# Altium PCB PCB V1.PcbDoc
Units mm, origin at the board's own origin, x right, y up, seen from the top; angles counter-clockwise.
Board outline 90 x 50 mm, 2 copper layers (Top Layer, Bottom Layer); 26 components, 22 nets, 122 pads, 31 vias.
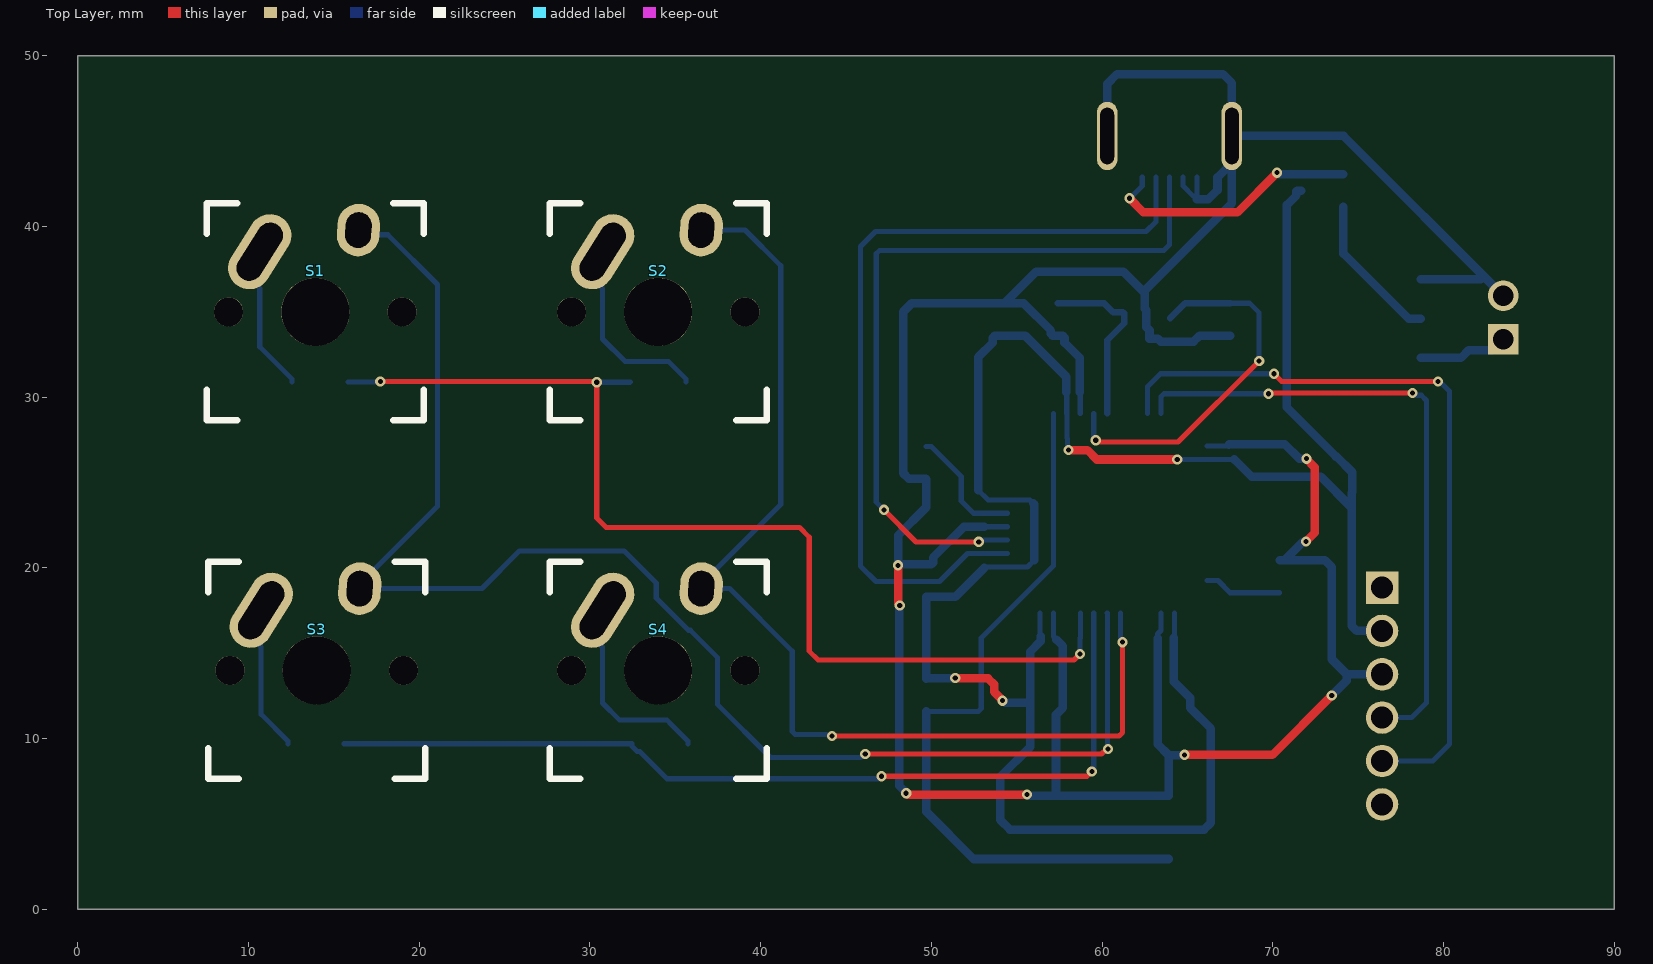
[diagram p0: Top Layer view]
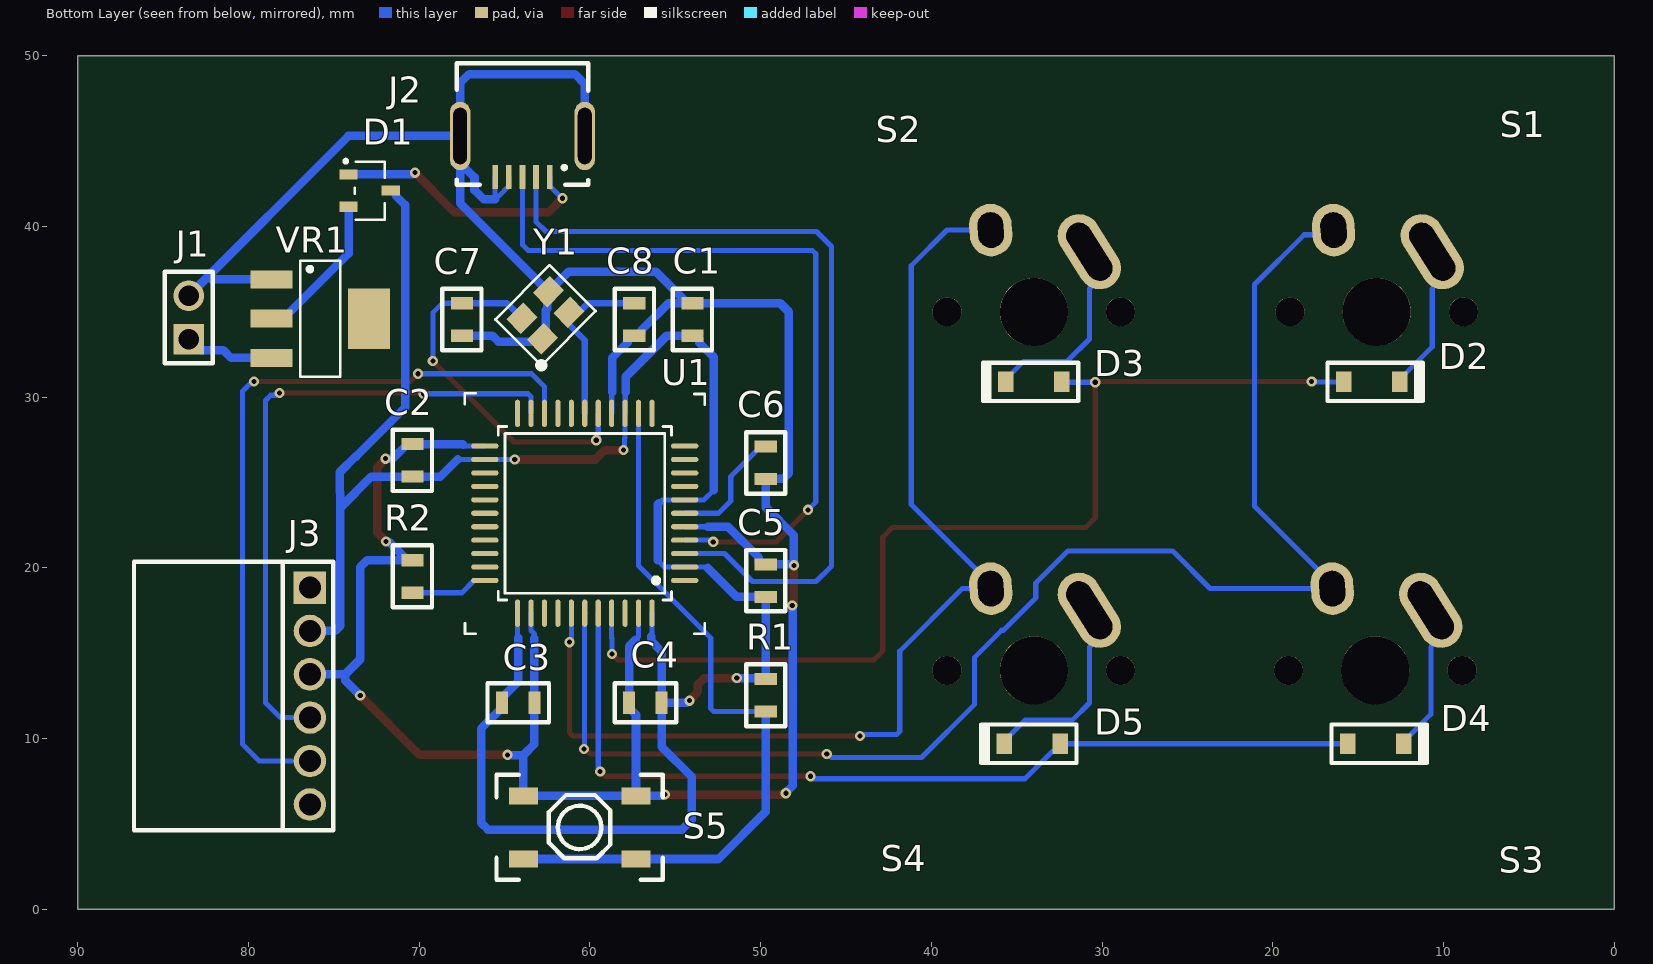
[diagram p1: Bottom Layer view, seen from below]
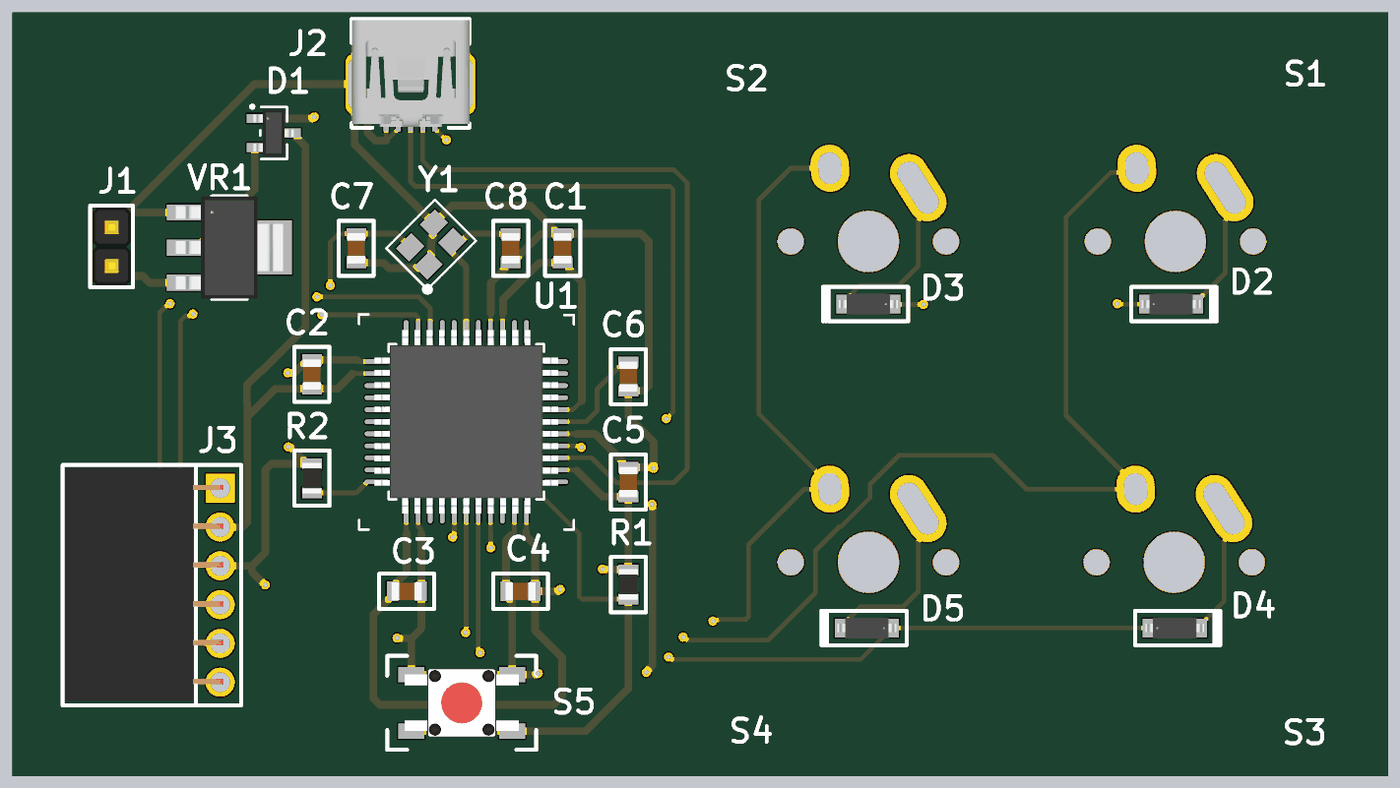
[diagram p2: 3D render of the assembled board from below, using the file's embedded part models]

## Layer stack, top to bottom
Top Solder: solder mask 0.0102, Solder Resist, Dk 3.5
Top Layer: signal copper 0.0356
Dielectric 1: dielectric 0.32, FR-4, Dk 4.8
Bottom Layer: signal copper 0.0356
Bottom Solder: solder mask 0.0102, Solder Resist, Dk 3.5

## Board outline
0,0 90,0 90,50 0,50

## Design rules (kind name [scope] priority, off if disabled: settings)
Clearance [All] p1: gap=0.2 ignorepadtopadclearanceinfootprint=FALSE
HoleSize [All] p1: absolutevalues=TRUE maxlimit=10 minlimit=0.025 maxpercent=80.000 minpercent=20.000
PolygonConnect [All] p1: connectstyle=Relief reliefconductorwidth=0.254 reliefentries=4 polygonreliefangle="90 Angle" airgapwidth=0.254
RoutingVias [All] p1: holewidth=0.3 width=0.6 viastyle="Through Hole" minholewidth=0.3 minwidth=0.6 maxholewidth=0.3 maxwidth=0.6
SolderMaskExpansion [All] p1: expansion=0.102 istentingtop=FALSE
Width [All] p1: maxlimit=0.5 minlimit=0.3 preferedwidth=0.3
29 further rules are at their usual default settings.

## Components (designator, comment, footprint, x,y, rotation, side; value= is the part's Value field where it differs from the comment)
C1 "C 0.1UF" C0805 54,34.552 r270 bottom
C2 "C 0.1UF" C0805 70.4,26.3 r270 bottom
C3 "C 0.1UF" C0805 64.2,12.1 r0 bottom
C4 "C 0.1UF" C0805 56.752,12.1 r180 bottom
C5 "C 4.7UF" C0805 49.7,19.252 r270 bottom
C6 "C 1UF" C0805 49.7,26.153 r270 bottom
C7 "C 22PF" C0805 67.5,34.552 r90 bottom
C8 "C 22PF" C0805 57.4,34.552 r90 bottom
D1 "Schottky" SOT-23-3_L2.9-W1.6-P1.90-LS2.8-BR 72.9,42.1 r0 bottom
D2 "Diode" Diode 14.2,30.9 r0 bottom
D3 "Diode" Diode 34,30.9 r180 bottom
D4 "Diode" Diode 13.962,9.7 r0 bottom
D5 "Diode" Diode 34.1,9.7 r180 bottom
J1 "BAT" HDR-TH_2P-P2.54-V-M-1 83.5,34.67 r90 bottom
J2 "USB" USB-MINI-SMD_UX60SC-MB-5S8-80 63.95,44.1 r0 bottom
J3 "HDR-Bluetooth" HDR-TH_6P-P2.54-H-W8.6_A2541HWR-6P 76.4,12.5 r270 bottom
R1 "R 10kohm" R0805 49.7,12.548 r270 bottom
R2 "R 10kohm" R0805 70.4,19.5 r90 bottom
S1 "Switch" Mx_Alps_100 13.92,35 r0 top
S2 "Switch" Mx_Alps_100 34,35 r0 top
S3 "Switch" Mx_Alps_100 14,14 r0 top
S4 "Switch" Mx_Alps_100 34,14 r0 top
S5 "Button" SW-SMD_4P-L5.1-W5.1-P3.70-LS6.5-TL-2 60.6,4.8 r0 bottom
U1 "MCU" ATMEGA32U4 60.3,23.2 r90 bottom
VR1 "Regulator" SOT-223_L6.5-W3.5-P2.30-LS7.0-BR 75.8,34.6 r0 bottom
Y1 "Crystal" CRYSTAL-SMD_4P-L3.2-W2.5-BL 62.6,34.8 r135 bottom

## Footprints (in the part's own frame and the unit in brackets; to place one, negate y for a bottom-side part, rotate by r counter-clockwise, add the part's x,y. Pads: shape width x height; smd on the part's side, far side on the other; paste and mask are expansions set on the pad)
ATMEGA32U4 [mm]
  oval 0.3x1.6 smd: 1(-3.937,-5.851) 2(-3.15,-5.851) 3(-2.362,-5.851) 4(-1.575,-5.851) 5(-0.787,-5.851) 6(0,-5.851) 7(0.787,-5.851) 8(1.575,-5.851) 9(2.362,-5.851) 10(3.15,-5.851) 11(3.937,-5.851) 23(3.937,5.851) 24(3.15,5.851) 25(2.362,5.851) 26(1.575,5.851) 27(0.787,5.851) 28(0,5.851) 29(-0.787,5.851) 30(-1.575,5.851) 31(-2.362,5.851) 32(-3.15,5.851) 33(-3.937,5.851)
  oval 1.6x0.3 smd: 12(5.851,-3.937) 13(5.851,-3.15) 14(5.851,-2.362) 15(5.851,-1.575) 16(5.851,-0.787) 17(5.851,0) 18(5.851,0.787) 19(5.851,1.575) 20(5.851,2.362) 21(5.851,3.15) 22(5.851,3.937) 34(-5.851,3.937) 35(-5.851,3.15) 36(-5.851,2.362) 37(-5.851,1.575) 38(-5.851,0.787) 39(-5.851,0) 40(-5.851,-0.787) 41(-5.851,-1.575) 42(-5.851,-2.362) 43(-5.851,-3.15) 44(-5.851,-3.937)
  silkscreen extent -7.06,-7.04 7.03,7.02, body extent -6,-6 6,6
C0805 [mil]
  rect 28x51 smd: 1(-37.5,0) 2(37.5,0)
  silkscreen extent -71,-45 71,45, body extent -39,-24 39,24, height 47
CRYSTAL-SMD_4P-L3.2-W2.5-BL [mm]
  rect 1.4x1.2 smd: 1(-1.1,-0.85) 2(1.1,-0.85) 3(1.1,0.85) 4(-1.1,0.85)
  silkscreen extent -2.43,-2.08 2.25,1.9
Diode [mil]
  rect 36x48 smd: 1(-64.5,0) 2(64.5,0)
  silkscreen extent -117,-44 102,44, body extent -76,-27 76,27, height 32
HDR-TH_2P-P2.54-V-M-1 [mm]
  rect 1.8x1.8 hole 1.2: 1(-1.27,0)
  round 1.8 hole 1.2: 2(1.27,0)
  silkscreen extent -2.68,-1.4 2.68,1.4, body extent -2.54,-1.28 2.54,1.26, height 2.5
HDR-TH_6P-P2.54-H-W8.6_A2541HWR-6P [mm]
  rect 1.9x1.9 hole 1.3: 1(-6.35,0)
  round 1.9 hole 1.3: 2(-3.81,0) 3(-1.27,0) 4(1.27,0) 5(3.81,0) 6(6.35,0)
  silkscreen extent -7.87,-10.3 7.87,1.37, body extent -7.67,-10.15 7.57,0.2, height 3.14
Mx_Alps_100 [mm]
  rrect100% 2.5x4.75 hole 3.75 slot 1.5 at 147.5 deg rot 147.5: 1(-3.255,3.52)
  rrect100% 2.5x3.08 hole 2.08 slot 1.5 at 176.1 deg rot 176.1: 2(2.52,4.79)
  round 3.988 hole 3.988: Un1(0,0)
  round 1.702 hole 1.702: Un2(-5.08,0) Un3(5.08,0)
  silkscreen extent -6.35,-6.35 6.35,6.35
R0805 [mil]
  rect 28x51 smd: 1(-37.5,0) 2(37.5,0)
  silkscreen extent -71,-45 72,45, body extent -39,-25 39,25, height 20
SOT-23-3_L2.9-W1.6-P1.90-LS2.8-BR [mm]
  rect 1.07x0.6 smd: 1(1.235,-0.95) 2(1.235,0.95) 3(-1.235,0)
  silkscreen extent -0.88,-1.82 1.5,1.7, body extent -1.32,-1.52 1.32,1.52
SOT-223_L6.5-W3.5-P2.30-LS7.0-BR [mm]
  rect 2.465x1.05 smd: 1(2.857,-2.3) 2(2.857,0) 3(2.857,2.3)
  rect 2.465x3.54 smd: 4(-2.857,0)
  silkscreen extent -1.17,-3.4 1.17,3.4, body extent -3.5,-3.35 3.5,3.35
SW-SMD_4P-L5.1-W5.1-P3.70-LS6.5-TL-2 [mm]
  rect 1.7x1 smd: 1(-3.3,1.849) 2(3.3,1.85) 3(-3.3,-1.85) 4(3.3,-1.85)
  silkscreen extent -4.88,-3.08 4.88,3.08, body extent -3.75,-2.25 3.75,2.25
USB-MINI-SMD_UX60SC-MB-5S8-80 [mm]
  rect 0.34x1.4 smd: 1(-1.6,1.2) 2(-0.8,1.2) 3(0,1.2) 4(0.8,1.2) 5(1.6,1.2)
  oval 1.2x4 hole 0.8 slot 3.3 at 90 deg: 6(-3.65,-1.2) 7(3.65,-1.2)
  silkscreen extent -3.85,-5.46 3.85,1.65, body extent -3.88,-5.4 3.82,1.6, height 0.35

## Part data
C1 C2 C3 C4: library part CL21C101JBANNNC, "CAP CER 100PF 50V C0G/NP0 0805", Capacitance=100pF, Case Code (Imperial)=0805, Case Code (Metric)=2012, Dielectric=C0G, Manufacturer=Samsung, Max Operating Temperature=125°C, Min Operating Temperature=-55°C, Supplier Part Number 1=1276-1014-1-ND, Temperature Coefficient=300ppm/°C, Tolerance=5%, Voltage=50V, Case/Package=0805, Category="Ceramic Capacitors", ComponentLink1Description=https://datasheet.ciiva.com/25710/cl21c101jbannnc-25710193.pdf?src-supplier=Digi-Key, ComponentLink1URL=https://datasheet.ciiva.com/25710/cl21c101jbannnc-25710193.pdf?src-supplier=Digi-Key, ComponentLink2Description=https://datasheet.ciiva.com/29199/454082-da-01-en-vs-kondensator-0805-29199900.pdf?src-supplier=Conrad, ComponentLink2URL=https://datasheet.ciiva.com/29199/454082-da-01-en-vs-kondensator-0805-29199900.pdf?src-supplier=Conrad, Construction=Flat, Contact Plating=Tin, Depth=1.25mm, Height=0.65mm, Lead Free="Lead Free", Length=2mm, Manufacturer Part Number=CL21C101JBANNNC, Material=Ceramic, Mount="Surface Mount", Packaging="Tape and Reel", Pricing 1="1=0.10000, 10=0.05400, 50=0.02940, 100=0.02410, 500=0.01718, 1000=0.01350 (USD)", Radiation Hardening=No, RoHS=Yes, RoHS Compliant=Yes, Series=CL, Stock 1=15526, Supplier 1=Digi-Key, Thickness=0.03inch, Voltage Rating=50V, Voltage Rating (DC)=50V, Width=0.049inch
C5: library part CL21A475KAQNNNE, "SAMSUNG ELECTRO-MECHANICS - CL21A475KAQNNNE - SMD Multilayer Ceramic Capacitor, 4.7 µF, 25 V, 0805 [2012 Metric], ± 10%, X5R, CL Series", Capacitance=4.7uF, Case Code (Imperial)=0805, Case Code (Metric)=2012, Dielectric=X5R, Manufacturer=Samsung, Max Operating Temperature=85°C, Min Operating Temperature=-55°C, Package Quantity=1, Supplier Part Number 1=1276-1244-1-ND, Tolerance=10%, Voltage Rating=25V, Case/Package=0805, Category="Ceramic Capacitors", ComponentLink1Description=https://datasheet.ciiva.com/25798/cl21a475kaqnnne-25798882.pdf?src-supplier=Digi-Key, ComponentLink1URL=https://datasheet.ciiva.com/25798/cl21a475kaqnnne-25798882.pdf?src-supplier=Digi-Key, Construction=Flat, Depth=1.25mm, Height=1.25mm, Lead Free="Lead Free", Length=2mm, Manufacturer Part Number=CL21A475KAQNNNE, Mount="Surface Mount", Packaging="Tape and Reel", Pricing 1="1=0.12000, 10=0.08300, 50=0.04700, 100=0.03890, 500=0.02728, 1000=0.02259 (USD)", Radiation Hardening=No, RoHS=Yes, RoHS Compliant=Yes, Series=CL, Supplier 1=Digi-Key, Thickness=0.055inch, Voltage Rating (DC)=25V, Width=0.049inch
C6: library part CL21B105KBFNNNE, "SAMSUNG ELECTRO-MECHANICS - CL21B105KBFNNNE - SMD Multilayer Ceramic Capacitor, 1 µF, 50 V, 0805 [2012 Metric], ± 10%, X7R, CL Series", Capacitance=1uF, Case Code (Imperial)=0805, Case Code (Metric)=2012, Dielectric=X7R, Manufacturer=Samsung, Max Operating Temperature=125°C, Min Operating Temperature=-55°C, Package Quantity=1, Supplier Part Number 1=1276-1029-1-ND, Tolerance=10%, Voltage=50V, Case/Package=0805, Category="Ceramic Capacitors", ComponentLink1Description=https://datasheet.ciiva.com/25800/cl21b105kbfnnne-25800291.pdf?src-supplier=Digi-Key, ComponentLink1URL=https://datasheet.ciiva.com/25800/cl21b105kbfnnne-25800291.pdf?src-supplier=Digi-Key, ComponentLink2Description=https://datasheet.ciiva.com/16449/cl21b105kbfnnne-16449003.pdf?src-supplier=Future+Electronics, ComponentLink2URL=https://datasheet.ciiva.com/16449/cl21b105kbfnnne-16449003.pdf?src-supplier=Future+Electronics, ComponentLink3Description=https://datasheet.ciiva.com/26838/getdatasheetpartid-354075-26838668.pdf?src-supplier=Verical, ComponentLink3URL=https://datasheet.ciiva.com/26838/getdatasheetpartid-354075-26838668.pdf?src-supplier=Verical, Construction=Flat, Depth=1.25mm, Height=1.25mm, Length=2mm, Manufacturer Part Number=CL21B105KBFNNNE, Mount="Surface Mount", Packaging="Tape and Reel", Pricing 1="1=0.13000, 10=0.09000, 50=0.05120, 100=0.04250, 500=0.02978, 1000=0.02465 (USD)", Radiation Hardening=No, RoHS=Yes, RoHS Compliant=Yes, Series=CL, Supplier 1=Digi-Key, Thickness=0.053inch, Voltage Rating=50V, Width=0.049inch
C7 C8: library part CL21C220JBANNNC, "Cap Ceramic 22pF 50V C0G 5% SMD 0805 125C T/R", Capacitance=22pF, Case Code (Imperial)=0805, Case Code (Metric)=2012, Dielectric=C0G, Manufacturer=Samsung, Max Operating Temperature=125°C, Min Operating Temperature=-55°C, Package Quantity=1, Supplier Part Number 1=1276-1047-1-ND, Temperature Coefficient=300ppm/°C, Tolerance=5%, Voltage=50V, Case/Package=0805, Category="Ceramic Capacitors", ComponentLink1Description=https://datasheet.ciiva.com/25801/cl21c220jbannnc-25801668.pdf?src-supplier=Digi-Key, ComponentLink1URL=https://datasheet.ciiva.com/25801/cl21c220jbannnc-25801668.pdf?src-supplier=Digi-Key, ComponentLink2Description=https://datasheet.ciiva.com/15227/getdatasheetpartid-355345-15227198.pdf?src-supplier=Verical, ComponentLink2URL=https://datasheet.ciiva.com/15227/getdatasheetpartid-355345-15227198.pdf?src-supplier=Verical, ComponentLink3Description=https://datasheet.ciiva.com/29199/454687-da-01-en-vs-kondensator-0805-29199501.pdf?src-supplier=Conrad, ComponentLink3URL=https://datasheet.ciiva.com/29199/454687-da-01-en-vs-kondensator-0805-29199501.pdf?src-supplier=Conrad, ComponentLink4Description=https://datasheet.ciiva.com/16387/cl05b104kq5nnnc-16387287.pdf?src-supplier=Future+Electronics, ComponentLink4URL=https://datasheet.ciiva.com/16387/cl05b104kq5nnnc-16387287.pdf?src-supplier=Future+Electronics, Contact Plating=Tin, Depth=1.25mm, Height=0.65mm, Lead Free="Lead Free", Length=2mm, Manufacturer Part Number=CL21C220JBANNNC, Material=Ceramic, Mount="Surface Mount", Packaging="Tape and Reel", Pricing 1="1=0.10000, 10=0.05400, 50=0.02940, 100=0.02390, 500=0.01710, 1000=0.01344 (USD)", Radiation Hardening=No, RoHS=Yes, Stock 1=65406, Supplier 1=Digi-Key, Thickness=0.03inch, Voltage Rating=50V, Voltage Rating (DC)=50V, Width=0.049inch
D1: library part BAT54CLT1G, "Diode Schottky 30V 0.2A 3-Pin SOT-23 T/R", Average Rectified Current=200mA, Capacitance=10pF, Case/Package=SOT-23-3, Forward Voltage=800mV, Manufacturer="ON Semiconductor", Max Forward Surge Current (Ifsm)=600mA, Max Operating Temperature=125°C, Max Power Dissipation=225mW, Max Repetitive Reverse Voltage (Vrrm)=30V, Max Reverse Current=2uA, Min Operating Temperature=-55°C, Package Quantity=3000, Supplier Part Number 1=BAT54CLT1GOSCT-ND, Category="Schottky Diodes", ComponentLink1Description=https://datasheet.ciiva.com/1240/bat54clt1-d-1240707.pdf?src-supplier=Newark, ComponentLink1URL=https://datasheet.ciiva.com/1240/bat54clt1-d-1240707.pdf?src-supplier=Newark, ComponentLink2Description=https://datasheet.ciiva.com/30479/0900766b8121b932-30479128.pdf?src-supplier=RSComponents, ComponentLink2URL=https://datasheet.ciiva.com/30479/0900766b8121b932-30479128.pdf?src-supplier=RSComponents, ComponentLink3Description=https://datasheet.ciiva.com/34301/885769-34301654.pdf?src-supplier=Jameco, ComponentLink3URL=https://datasheet.ciiva.com/34301/885769-34301654.pdf?src-supplier=Jameco, ComponentLink4Description=https://datasheet.ciiva.com/15144/getdatasheetpartid-98336-15144809.pdf?src-supplier=Verical, ComponentLink4URL=https://datasheet.ciiva.com/15144/getdatasheetpartid-98336-15144809.pdf?src-supplier=Verical, ComponentLink5Description=https://datasheet.ciiva.com/1180/bat54clt1-d-1180248.pdf?src-supplier=Element14, ComponentLink5URL=https://datasheet.ciiva.com/1180/bat54clt1-d-1180248.pdf?src-supplier=Element14, ComponentLink6Description=https://datasheet.ciiva.com/1180/bat54clt1-d-1180247.pdf?src-supplier=Element14, ComponentLink6URL=https://datasheet.ciiva.com/1180/bat54clt1-d-1180247.pdf?src-supplier=Element14, ComponentLink7Description=https://datasheet.ciiva.com/22659/1918740-22659014.pdf?src-supplier=Element14, ComponentLink7URL=https://datasheet.ciiva.com/22659/1918740-22659014.pdf?src-supplier=Element14, ComponentLink8Description=https://datasheet.ciiva.com/28655/bat54clt1-d-28655787.pdf?src-supplier=Element14, ComponentLink8URL=https://datasheet.ciiva.com/28655/bat54clt1-d-28655787.pdf?src-supplier=Element14, ComponentLink9Description=https://datasheet.ciiva.com/8294/bat54clt1-d-8294495.pdf?src-supplier=Avnet, ComponentLink9URL=https://datasheet.ciiva.com/8294/bat54clt1-d-8294495.pdf?src-supplier=Avnet, ComponentLink10Description=https://datasheet.ciiva.com/16205/bat54clt1-d-16205033.pdf?src-supplier=Future+Electronics, ComponentLink10URL=https://datasheet.ciiva.com/16205/bat54clt1-d-16205033.pdf?src-supplier=Future+Electronics, ComponentLink11Description=https://datasheet.ciiva.com/905/bat54clt1-d-905835.pdf?src-supplier=Digi-Key, ComponentLink11URL=https://datasheet.ciiva.com/905/bat54clt1-d-905835.pdf?src-supplier=Digi-Key, Contact Plating=Tin,Matte, Current Rating=200mA, Element Configuration="Common Cathode", Forward Current=200mA, Halogen Free="Halogen Free", Height=1.01mm, Lead Free="Lead Free", Length=3.04mm, Manufacturer Part Number=BAT54CLT1G, Max Reverse Leakage Current=2uA, Max Reverse Voltage (DC)=30V, Max Surge Current=600mA, Number of Pins=3, Packaging="Tape and Reel", Peak Non-Repetitive Surge Current=600mA, Power Dissipation=225mW, Pricing 1="1=0.17000, 10=0.15600, 100=0.08490, 500=0.05224, 1000=0.03562 (USD)", Radiation Hardening=No, REACH SVHC="No SVHC", Recovery Time=5ns, Reverse Recovery Time=5ns, RoHS=Yes, Supplier 1=Digi-Key, Voltage Rating (DC)=30V, Width=1.4mm
D2 D3 D4 D5: library part 1N4148W-TP, "MICRO COMMERCIAL COMPONENTS - 1N4148W-TP - SWITCHING DIODE, 150mA, 100V, SOD123, FU", Average Rectified Current=150mA, Capacitance=4pF, Forward Voltage=1V, Manufacturer=MCC, Max Forward Surge Current (Ifsm)=1A, Max Operating Temperature=150°C, Max Repetitive Reverse Voltage (Vrrm)=100V, Max Reverse Leakage Current=5uA, Max Surge Current=2A, Min Operating Temperature=-65°C, Package Quantity=3000, Power Dissipation=400mW, Supplier Part Number 1=1N4148WTPMSCT-ND, Category="Rectifier Diodes", ComponentLink1Description=https://datasheet.ciiva.com/1243/1684829-1243908.pdf?src-supplier=Newark, ComponentLink1URL=https://datasheet.ciiva.com/1243/1684829-1243908.pdf?src-supplier=Newark, ComponentLink2Description=https://datasheet.ciiva.com/16836/1n4148wsod123-16836277.pdf?src-supplier=Future+Electronics, ComponentLink2URL=https://datasheet.ciiva.com/16836/1n4148wsod123-16836277.pdf?src-supplier=Future+Electronics, ComponentLink3Description=https://datasheet.ciiva.com/4435/1n4148wsod123-48460-4435223.pdf?src-supplier=Mouser, ComponentLink3URL=https://datasheet.ciiva.com/4435/1n4148wsod123-48460-4435223.pdf?src-supplier=Mouser, ComponentLink4Description=https://datasheet.ciiva.com/14557/70055519-14557767.pdf?src-supplier=Allied+Electronics, ComponentLink4URL=https://datasheet.ciiva.com/14557/70055519-14557767.pdf?src-supplier=Allied+Electronics, ComponentLink5Description=https://datasheet.ciiva.com/911/1n4148wsod123-911676.pdf?src-supplier=Digi-Key, ComponentLink5URL=https://datasheet.ciiva.com/911/1n4148wsod123-911676.pdf?src-supplier=Digi-Key, ComponentLink6Description=https://datasheet.ciiva.com/7622/1684829-7622556.pdf?src-supplier=Element14, ComponentLink6URL=https://datasheet.ciiva.com/7622/1684829-7622556.pdf?src-supplier=Element14, ComponentLink7Description=https://datasheet.ciiva.com/911/1n4148wsod123-911677.pdf?src-supplier=Digi-Key, ComponentLink7URL=https://datasheet.ciiva.com/911/1n4148wsod123-911677.pdf?src-supplier=Digi-Key, ComponentLink8Description=https://datasheet.ciiva.com/911/1n4148wsod123-911678.pdf?src-supplier=Digi-Key, ComponentLink8URL=https://datasheet.ciiva.com/911/1n4148wsod123-911678.pdf?src-supplier=Digi-Key, ComponentLink9Description=https://datasheet.ciiva.com/22747/1684829-22747439.pdf?src-supplier=Element14, ComponentLink9URL=https://datasheet.ciiva.com/22747/1684829-22747439.pdf?src-supplier=Element14, Current Rating=150mA, Element Configuration=Single, Forward Current=150mA, Height=1.2mm, Lead Free="Lead Free", Length=2.85mm, Manufacturer Part Number=1N4148W-TP, Max Reverse Voltage (DC)=100V, Mount="Surface Mount", Number of Pins=2, Output Current=150mA, Packaging="Tape and Reel", Peak Non-Repetitive Surge Current=2A, Polarity=Standard, Pricing 1="1=0.19000, 10=0.17300, 100=0.09440, 500=0.05808, 1000=0.03960 (USD)", Radiation Hardening=No, REACH SVHC=Unknown, Recovery Time=4ns, Reverse Recovery Time=4ns, RoHS=Yes, Stock 1=295290, Supplier 1=Digi-Key, Voltage Rating (DC)=100V, Width=1.8mm
J1: library part 22-28-4020, "CONN HEADER VERT 2POS 2.54MM", Color=Black, Contact Resistance=20mR, Current Rating=4A, Flammability Rating="UL94 V-0", Manufacturer=Molex, Max Operating Temperature=75°C, Max Voltage Rating (AC)=250V, Min Operating Temperature=0°C, Package Quantity=1, Supplier Part Number 1=WM50014-02-ND, Category="Headers and Wire Housings", ComponentLink1Description=https://datasheet.ciiva.com/1433/1596842-1433683.pdf?src-supplier=Element14, ComponentLink1URL=https://datasheet.ciiva.com/1433/1596842-1433683.pdf?src-supplier=Element14, ComponentLink2Description=https://datasheet.ciiva.com/30153/214440022284020-pcb-headers-30153261.pdf?src-supplier=Onlinecomponents.com, ComponentLink2URL=https://datasheet.ciiva.com/30153/214440022284020-pcb-headers-30153261.pdf?src-supplier=Onlinecomponents.com, ComponentLink3Description=https://datasheet.ciiva.com/16658/0022284020-pcb-headers-16658182.pdf?src-supplier=Avnet+Europe, ComponentLink3URL=https://datasheet.ciiva.com/16658/0022284020-pcb-headers-16658182.pdf?src-supplier=Avnet+Europe, ComponentLink4Description=https://datasheet.ciiva.com/5157/0022284020-pcb-headers-228358-5157523.pdf?src-supplier=Mouser, ComponentLink4URL=https://datasheet.ciiva.com/5157/0022284020-pcb-headers-228358-5157523.pdf?src-supplier=Mouser, ComponentLink5Description=https://datasheet.ciiva.com/15217/getdatasheetpartid-127875-15217702.pdf?src-supplier=Verical, ComponentLink5URL=https://datasheet.ciiva.com/15217/getdatasheetpartid-127875-15217702.pdf?src-supplier=Verical, ComponentLink6Description=https://datasheet.ciiva.com/10088/0022284020-pcb-headers-10088332.pdf?src-supplier=Avnet, ComponentLink6URL=https://datasheet.ciiva.com/10088/0022284020-pcb-headers-10088332.pdf?src-supplier=Avnet, ComponentLink7Description=https://datasheet.ciiva.com/49385/879406-49385687.pdf?src-supplier=Jameco, ComponentLink7URL=https://datasheet.ciiva.com/49385/879406-49385687.pdf?src-supplier=Jameco, Connector Type="Male Pin", Contact Material=Brass,Bronze, Contact Mating Length=0.24inch, Contact Plating=Tin, Contact Type="Male Pin", Depth=2.49mm, Gender=Male, Glow Wire Compliant=Non-compliant, Housing Color=Black, Housing Material=Nylon, Lead Free="Lead Free", Manufacturer Part Number=22-28-4020, Max Voltage Rating (DC)=250V, Mount="Through Hole", Number of Circuits=2, Number of Contacts=2, Number of Positions=2, Number of Rows=1, Orientation=Straight, Packaging=Bulk, Pitch=2.54mm, Pricing 1="1=0.12000, 10=0.08200, 100=0.05890 (USD)", Radiation Hardening=No, REACH SVHC=Unknown, RoHS=Yes, Series="KK® 42375", Stock 1=2565, Supplier 1=Digi-Key, Termination=Solder, Voltage Rating=250V, Voltage Rating (DC)=250V
J2: library part UX60SC-MB-5S8(80), "CONN RCPT MINI USB2.0 5POS", Current Rating=1A, Manufacturer=Hirose, Max Operating Temperature=75°C, Min Operating Temperature=-30°C, Package Quantity=1000, Supplier Part Number 1=H125762CT-ND, Voltage Rating=30V, Category=Connectors, ComponentLink1Description=https://datasheet.ciiva.com/22825/0900766b8118eafc-22825831.pdf?src-supplier=RSComponents, ComponentLink1URL=https://datasheet.ciiva.com/22825/0900766b8118eafc-22825831.pdf?src-supplier=RSComponents, ComponentLink2Description=https://datasheet.ciiva.com/18563/ux60s-18563943.pdf?src-supplier=Digi-Key, ComponentLink2URL=https://datasheet.ciiva.com/18563/ux60s-18563943.pdf?src-supplier=Digi-Key, Connector Type=USB, Contact Material="Copper Alloy", Gender=Receptacle, Manufacturer Part Number=UX60SC-MB-5S8(80), Mount="Surface Mount,Horizontal,Through Hole", Number of Contacts=5, Orientation="Right Angle", Packaging="Tape and Reel", Pricing 1="1=0.75000, 10=0.66300, 25=0.62400, 50=0.59800, 100=0.57200, 250=0.52000, 500=0.46800 (USD)", RoHS=Yes, RoHS Compliant=Yes, Series=UX60S, Stock 1=3000, Supplier 1=Digi-Key, Termination=Solder
J3: library part A2541HWR-6P, Manufacturer="CJT Connectors", Supplier Part Number 1=C225514, Category=Uncategorized, Manufacturer Part Number=A2541HWR-6P, Pricing 1="1=1.41510, 10=1.13220, 30=1.08030, 100=1.02830, 500=1.00520, 1000=0.99380, 1=1.36720, 10=1.09390, 30=1.04380, 100=0.99360, 500=0.97130, 1000=0.96020, 1=7.15180, 10=5.72210, 30=5.46000, 100=5.19730, 500=5.08050, 1000=5.02280, 1=6.79030, 10=5.43280, 30=5.18400, 100=4.93460, 500=4.82370, 1000=4.76890, 1=0.91320, 10=0.73070, 30=0.69720, 100=0.66370, 500=0.64870, 1000=0.64140, 1=0.79380, 10=0.63510, 30=0.60600, 100=0.57690, 500=0.56390, 1000=0.55750, 1=8.55700, 10=6.84640, 30=6.53280, 100=6.21850, 500=6.07880, 1000=6.00970, 1=119.38420, 10=95.51820, 30=91.14350, 100=86.75790, 500=84.80880, 1000=83.84510, 1=4.51910, 10=3.61570, 30=3.45010, 100=3.28410, 500=3.21030, 1000=3.17390, 1=82.66820, 10=66.14210, 30=63.11280, 100=60.07600, 500=58.72630, 1000=58.05890, 1=9.24660, 10=7.39810, 30=7.05930, 100=6.71960, 500=6.56860, 1000=6.49400, 1=1.46250, 10=1.17010, 30=1.11650, 100=1.06280, 500=1.03890, 1000=1.02710, 1=1.10250, 10=0.88210, 30=0.84170, 100=0.80120, 500=0.78320, 1000=0.77430 (AUD)", RoHS=No, Stock 1=3270, Supplier 1=LCSC
R1 R2: library part 0805W8F1002T5E, Manufacturer=Uniroyal, Supplier Part Number 1=C17414, Manufacturer Part Number=0805W8F1002T5E, RoHS=Yes, RoHS Compliant=Yes, Supplier 1=LCSC
S5: library part TS-1187A-B-A-B, Manufacturer="XKB Connectivity", Supplier Part Number 1=C318884, Category=Uncategorized, Manufacturer Part Number=TS-1187A-B-A-B, RoHS=No, Supplier 1=LCSC
U1: library part ATMEGA32U4-AU, "MCU 8-bit ATmega AVR RISC 32KB Flash 3.3V/5V 44-Pin TQFP", Case/Package=TQFP, Frequency=16MHz, Manufacturer="Microchip / Atmel", Max Operating Temperature=85°C, Max Supply Voltage=5.5V, Min Operating Temperature=-40°C, Min Supply Voltage=2.7V, Package Quantity=800, Supplier Part Number 1=ATMEGA32U4-AU-ND, Category=Microcontrollers, ComponentLink1Description=https://datasheet.ciiva.com/22651/1684411-22651233.pdf?src-supplier=Farnell, ComponentLink1URL=https://datasheet.ciiva.com/22651/1684411-22651233.pdf?src-supplier=Farnell, ComponentLink2Description=https://datasheet.ciiva.com/4842/doc7766-31808-4842466.pdf?src-supplier=Mouser, ComponentLink2URL=https://datasheet.ciiva.com/4842/doc7766-31808-4842466.pdf?src-supplier=Mouser, ComponentLink3Description=https://datasheet.ciiva.com/15122/getdatasheetpartid-116246-15122378.pdf?src-supplier=Verical, ComponentLink3URL=https://datasheet.ciiva.com/15122/getdatasheetpartid-116246-15122378.pdf?src-supplier=Verical, ComponentLink4Description=https://datasheet.ciiva.com/26817/atmega32u4-au-26817829.pdf?src-supplier=IIIC, ComponentLink4URL=https://datasheet.ciiva.com/26817/atmega32u4-au-26817829.pdf?src-supplier=IIIC, ComponentLink5Description=https://datasheet.ciiva.com/1157/1684411-1157762.pdf?src-supplier=Element14, ComponentLink5URL=https://datasheet.ciiva.com/1157/1684411-1157762.pdf?src-supplier=Element14, Core Architecture=AVR, Data Bus Width=8b, Height=1.05mm, Interface=SPI,USART,I2C,USB,UART,I2S, Lead Free="Lead Free", Length=10mm, Manufacturer Part Number=ATMEGA32U4-AU, Max Frequency=16MHz, Memory Size=32KB, Memory Type=FLASH, Mount="Surface Mount", Number of ADC Channels=12, Number of I2C Channels=1, Number of I/Os=26, Number of Pins=44, Number of Programmable I/O=26, Number of PWM Channels=8, Number of SPI Channels=1, Number of Timers/Counters=5, Oscillator Type=External, Packaging=Tray, Peripherals="Brown-out Detect/Reset,POR,PWM,WDT", Pricing 1="1=4.83000, 25=4.41600, 100=4.01350 (USD)", Radiation Hardening=No, RAM Size=2.5KB, REACH SVHC="No SVHC", RoHS=Yes, Series="AVR® ATmega", Supplier 1=Digi-Key, Watchdog Timer=Yes, Width=10mm
VR1: library part AMS1117-5.0, Case/Package=Module, Manufacturer="Advanced Monolithic Systems", Supplier Part Number 1=C6187, Manufacturer Part Number=AMS1117-5.0, Pricing 1="1=1.19980, 10=0.91640, 30=0.86440, 100=0.81230, 500=0.78920, 1000=0.77780, 1=1.15930, 10=0.88550, 30=0.83520, 100=0.78490, 500=0.76260, 1000=0.75150, 1=6.06400, 10=4.63160, 30=4.36890, 100=4.10560, 500=3.98880, 1000=3.93110, 1=5.75740, 10=4.39750, 30=4.14810, 100=3.89800, 500=3.78720, 1000=3.73230, 1=0.77430, 10=0.59140, 30=0.55790, 100=0.52430, 500=0.50930, 1000=0.50200, 1=0.67310, 10=0.51410, 30=0.48490, 100=0.45570, 500=0.44270, 1000=0.43630, 1=7.25540, 10=5.54170, 30=5.22730, 100=4.91220, 500=4.77250, 1000=4.70340, 1=101.22480, 10=77.31550, 30=72.92990, 100=68.53360, 500=66.58440, 1000=65.62070, 1=3.83170, 10=2.92670, 30=2.76070, 100=2.59430, 500=2.52050, 1000=2.48400, 1=70.09360, 10=53.53750, 30=50.50070, 100=47.45640, 500=46.10670, 1000=45.43940, 1=7.84010, 10=5.98830, 30=5.64860, 100=5.30810, 500=5.15710, 1000=5.08250, 1=1.24000, 10=0.94710, 30=0.89340, 100=0.83960, 500=0.81570, 1000=0.80390, 1=0.93480, 10=0.71400, 30=0.67350, 100=0.63290, 500=0.61490, 1000=0.60600 (AUD)", RoHS=Yes, Stock 1=41515, Supplier 1=LCSC
Y1: library part X1E0000210264, Manufacturer=Seiko, Supplier Part Number 1=C91744, Manufacturer Part Number=X1E0000210264, RoHS=No, Supplier 1=LCSC

## Via types
v1: diameter 0.6, hole 0.3, Top Layer to Bottom Layer, 31 vias

## Nets (pads, with @x,y where several pads share a name; then routed paths per layer and width w, separated by ;. In a path a pad name is that pad's centre, name@x,y a point inside that pad or via, vN(x,y) a via of type N, cw(c..) or ccw(c..) an arc to the next point about the centre after c; other vN are vias at no path point)
col0: S1.2 S3.2 U1.39 | length 85.7
  Top Layer w0.3: v1(46.125,9.1) 59.969,9.1 60.269,9.4 v1(60.35,9.4)
  Bottom Layer w0.3: S1.2 16.715,39.515 18.16,39.515 21.075,36.6 21.075,23.615 16.52,19.06 S3.2 23.673,18.79 25.883,21 32,21 33.888,19.112 33.888,18.237 35.775,16.35 35.875,16.35 37.463,14.762 37.463,12.012 40.575,8.9 45.844,8.9 46.044,9.1 v1(46.125,9.1) ; U1.39 60.308,17.341 60.308,9.442 v1(60.35,9.4)
col1: S2.2 S4.2 U1.38 | length 64.5
  Top Layer w0.3: v1(44.175,10.15) 60.987,10.15 61.188,10.351 61.188,15.637 v1(61.2,15.65)
  Bottom Layer w0.3: S2.2 39.085,39.79 41.175,37.7 41.175,23.715 36.52,19.06 S4.2 38.185,18.79 41.85,15.125 41.85,10.426 42.026,10.25 43.863,10.25 43.905,10.207 44.118,10.207 v1(44.175,10.15) ; U1.38 61.087,15.844 61.2,15.731 v1(61.2,15.65)
GND: C1.1 C2.1 C3.1 C4.1 C5.1 C6.2 C7.1 C8.1 J1.2 J2.4 J2.5 J2.6 J2.7 J3.3 R2.2 S5.3 S5.4 U1.5 U1.15 U1.23 U1.35 U1.43 VR1.1 Y1.1 Y1.3 | length 200.5
  Top Layer w0.5: v1(48.05,20.15) 48.05,17.927 48.15,17.827 v1(48.15,17.8) ; v1(48.525,6.8) 48.6,6.725 v1(55.6,6.725) ; v1(64.825,9.05) 69.975,9.05 v1(73.45,12.525) ; v1(71.95,21.55) 72.45,22.05 72.45,25.898 71.975,26.373 v1(71.975,26.4)
  Bottom Layer w0.3: 53.1,22.4 53.113,22.413 U1.5 ; U1.43 57.15,15.975 57.325,15.8 ; 58.7,30.3 58.718,30.282 58.718,29.059 U1.15 ; 63.248,15.877 63.245,15.879 63.245,16.128 63.45,16.332 U1.35 ; J2.4 64.75,42.37 65.345,41.775 65.375,41.775 65.55,41.6 J2.5 ; U1.23 67.337,27.137 67.425,27.225
  Bottom Layer w0.5: v1(48.15,17.8) 48.125,17.775 48.125,7.227 48.525,6.827 v1(48.525,6.8) ; 53.1,22.4 51.895,22.4 50.098,20.603 50.098,20.311 49.992,20.205 C5.1 49.69,20.215 48.142,20.215 48.077,20.15 v1(48.05,20.15) 48.05,21.9 49.7,23.55 C6.2 49.668,25.232 48.668,25.232 48.357,25.543 48.357,35.007 48.855,35.505 C1.1 C1.1@54.292,35.505 ; v1(55.6,6.725) 55.675,6.65 S5.3 ; 57.325,15.8 57.705,15.42 C4.1 57.705,11.808 57.3,11.403 S5.3 ; 58.7,30.3 58.7,32.3 57.798,33.202 57.798,33.494 57.692,33.6 C8.1 57.108,33.6 57.002,33.706 57.002,33.9 55.398,35.505 C1.1@54.292,35.505 ; J2.6 60.3,48.35 60.875,48.925 67.075,48.925 67.6,48.4 J2.7 ; 63.248,15.877 C3.1 63.248,9.68 63.9,9.028 ; v1(64.825,9.05) 64.803,9.028 63.9,9.028 ; 65.55,41.6 66.225,41.6 66.759,42.134 66.759,42.87 J2.7@67.6,43.711 ; 67.425,27.225 67.453,27.253 C2.1 70.692,27.253 71.545,26.4 v1(71.975,26.4) ; C7.1 65.709,33.6 65.363,33.254 63.439,33.254 63.272,33.421 Y1.1 62.777,33.916 62.59,34.103 62.59,35.093 62.494,35.189 62.494,36.108 Y1.3 ; R2.2 R2.2@70.692,20.452 ; v1(71.95,21.55) 71.931,21.531 71.77,21.531 R2.2@70.692,20.452 ; v1(73.45,12.525) 74.33,13.405 74.33,13.77 ; J3.3 74.33,13.77 ; VR1.1 82.188,36.9 ; J1.2 74.14,45.3 J2.7 ; C1.1@54.292,35.505 56.137,37.35 61.252,37.35 Y1.3 ; S5.3 S5.4 63.9,9.028 ; Y1.3 67.6,41.356 J2.7@67.6,43.711 ; J2.7@67.6,43.711 J2.7 ; R2.2@70.692,20.452 73.048,20.452 73.45,20.05 73.45,14.65 74.33,13.77
NetC6_1: C6.1 U1.6 | length 7.2
  Bottom Layer w0.3: C6.1 49.992,27.105 51.749,25.348 51.749,23.926 52.475,23.2 U1.6
NetC7_2: C7.2 U1.16 Y1.4 | length 21.8
  Top Layer w0.3: v1(59.625,27.475) 59.7,27.475 59.8,27.375 64.45,27.375 v1(69.2,32.125)
  Bottom Layer w0.3: U1.16 59.513,27.669 59.625,27.556 v1(59.625,27.475) ; C7.2 68.645,35.505 69.2,34.95 v1(69.2,32.125)
  Bottom Layer w0.381: Y1.4 64.861,35.505 C7.2
NetC8_2: C8.2 U1.17 Y1.2 | length 10.4
  Bottom Layer w0.381: C8.2 60.114,35.505 60.642,34.977 Y1.2 61.292,34.906 61.292,34.327 60.3,33.335 U1.17
NetD1_2: D1.2 VR1.2 | length 8.8
  Bottom Layer w0.5: D1.2 74.135,38.415 77.95,34.6 VR1.2
NetD2_1: D2.1 S1.1 | length 8.6
  Bottom Layer w0.3: S1.1 10.481,38.336 10.481,36.555 10.665,36.371 10.665,32.949 12.562,31.052 D2.1
NetD3_1: D3.1 S2.1 | length 11.3
  Bottom Layer w0.3: S2.1 30.562,38.336 30.562,36.555 30.745,36.371 30.745,33.405 32.05,32.1 34.591,32.1 35.638,31.052 D3.1
NetD4_1: D4.1 S3.1 | length 8.6
  Bottom Layer w0.3: S3.1 10.561,17.336 10.561,15.555 10.745,15.371 10.745,11.431 12.323,9.852 D4.1
NetD5_1: D5.1 S4.1 | length 11.7
  Bottom Layer w0.3: S4.1 30.562,17.336 30.562,15.555 30.745,15.371 30.745,12.08 31.725,11.1 34.5,11.1 34.7,10.9 34.7,10.891 35.738,9.852 D5.1
NetJ1_1: J1.1 VR1.3 | length 5.3
  Bottom Layer w0.5: VR1.3 81.02,32.3 81.47,32.75 82.85,32.75 J1.1
NetJ2_2: J2.2 U1.3 | length 48.9
  Bottom Layer w0.3: U1.3 52.113,20.838 50.475,19.2 46.75,19.2 45.849,20.101 45.849,38.824 46.725,39.7 62.575,39.7 63.15,40.275 J2.2
NetJ2_3: J2.3 U1.4 | length 44.6
  Top Layer w0.3: v1(47.225,23.4) 49.1,21.525 v1(52.775,21.525)
  Bottom Layer w0.3: v1(47.225,23.4) 46.775,23.85 46.775,38.4 46.975,38.6 63.625,38.6 63.95,38.925 J2.3 ; v1(52.775,21.525) 52.856,21.525 52.956,21.625 U1.4
NetJ3_4: J3.4 U1.21 | length 37.5
  Top Layer w0.3: v1(69.749,30.201) 69.797,30.25 v1(78.175,30.25)
  Bottom Layer w0.3: U1.21 63.45,30.026 63.625,30.201 v1(69.749,30.201) ; J3.4 78.13,11.23 79,12.1 79,29.802 78.693,30.109 78.397,30.109 78.256,30.25 v1(78.175,30.25)
NetJ3_5: J3.5 U1.20 | length 45
  Top Layer w0.3: v1(70.075,31.375) 70.525,30.925 v1(79.675,30.925)
  Bottom Layer w0.3: U1.20 62.662,30.612 63.425,31.375 v1(70.075,31.375) ; J3.5 79.365,8.69 80.35,9.675 80.35,30.35 79.95,30.75 79.931,30.75 79.756,30.925 v1(79.675,30.925)
NetR1_2: R1.2 S5.1 S5.2 U1.13 | length 43.5
  Bottom Layer w0.3: R1.2 52.749,11.595 52.925,11.771 52.925,15.9 57.15,20.125 U1.13
  Bottom Layer w0.5: R1.2 49.7,5.725 52.474,2.951 S5.1 ; S5.1 S5.2@63.899,2.95
NetR2_1: R2.1 U1.33 | length 4.5
  Bottom Layer w0.3: U1.33 66.781,19.263 67.497,18.547 R2.1
row0: D2.2 D3.2 U1.41 | length 62.7
  Top Layer w0.3: v1(17.725,30.925) 30.35,30.925 v1(30.4,30.875) 30.4,22.925 30.95,22.375 42.275,22.375 42.85,21.8 42.85,15.125 43.375,14.6 58.35,14.6 v1(58.7,14.95)
  Bottom Layer w0.3: D2.2 17.7,30.9 v1(17.725,30.925) ; v1(30.4,30.875) 32.337,30.875 D3.2 ; v1(58.7,14.95) 58.7,15.886 58.725,15.911 U1.41
row1: D4.2 D5.2 U1.40 | length 54.2
  Top Layer w0.3: v1(47.075,7.8) 59.125,7.8 v1(59.4,8.075)
  Bottom Layer w0.3: D4.2 D5.2 32.462,9.548 32.769,9.24 32.921,9.24 34.512,7.65 46.925,7.65 v1(47.075,7.8) ; v1(59.4,8.075) 59.4,8.156 59.513,8.269 U1.40
V_USB: D1.1 J2.1 | length 15.5
  Top Layer w0.5: v1(61.6,41.65) 62.425,40.825 67.925,40.825 v1(70.25,43.15)
  Bottom Layer w0.3: v1(61.6,41.65) 61.63,41.65 62.35,42.37 J2.1
  Bottom Layer w0.5: v1(70.25,43.15) 70.277,43.15 70.377,43.05 D1.1
VCC: C1.2 C2.2 C3.2 C4.2 C5.2 D1.3 J3.2 R1.1 U1.2 U1.7 U1.14 U1.24 U1.34 U1.44 | length 131.4
  Top Layer w0.5: v1(51.4,13.55) 51.425,13.525 53.325,13.525 53.679,13.171 53.679,12.737 54.164,12.252 v1(54.164,12.225) ; v1(58.025,26.9) 59.139,26.9 59.689,26.35 v1(64.4,26.35)
  Bottom Layer w0.3: 52.75,24.55 53.313,23.987 U1.7 55.763,23.987 55.975,23.775 ; 53.1,20 53.15,20.05 U1.2 54.456,20.058 55.633,20.058 56.025,20.45 ; U1.44 56.363,16.037 56.4,16 ; 57.9,30.3 57.93,30.27 57.93,29.059 U1.14 57.938,27.612 57.968,27.582 57.968,26.957 v1(58.025,26.9) ; 64.2,15.9 64.237,15.937 U1.34 ; v1(64.4,26.35) U1.24 67.75,26.35
  Bottom Layer w0.5: v1(51.4,13.55) 51.381,13.531 49.731,13.531 R1.1 C5.2 51.4,18.3 53.1,20 ; 52.75,24.55 52.75,32.35 53.602,33.202 53.602,33.494 53.708,33.6 C1.2 55.5,33.6 57.9,31.2 57.9,30.3 ; v1(54.164,12.225) 54.191,12.225 54.316,12.1 C4.2 ; 55.975,23.775 56.025,23.725 56.025,20.45 ; 56.4,16 56.4,15.7 55.8,15.1 55.8,12.392 C4.2 ; 64.2,15.9 64.2,13.345 65.153,12.392 C3.2 65.153,11.808 66.375,10.585 66.375,5.075 65.975,4.675 54.6,4.675 54.025,5.25 54.025,7.754 55.8,9.529 C4.2 ; 67.75,26.35 68.752,25.348 C2.2 72.05,25.348 72.802,25.348 74.625,23.525 ; D1.3 71.43,42.1 71.38,42.05 71.38,41.815 70.825,41.26 70.825,29.4 73.7,26.525 73.725,26.525 74.65,25.6 74.65,24.425 74.625,24.4 74.625,23.525 ; J3.2 74.918,16.31 74.625,16.603 74.625,23.525
pads on no net: J3.1 J3.6 S1.Un1 S1.Un2 S1.Un3 S2.Un1 S2.Un2 S2.Un3 S3.Un1 S3.Un2 S3.Un3 S4.Un1 S4.Un2 S4.Un3 U1.1 U1.8 U1.9 U1.10 U1.11 U1.12 U1.18 U1.19 U1.22 U1.25 U1.26 U1.27 U1.28 U1.29 U1.30 U1.31 U1.32 U1.36 U1.37 U1.42 VR1.4